# EAGLE board Transistor_Valve_Breakout_Circuit_Manual (EAGLE 9.3.0)
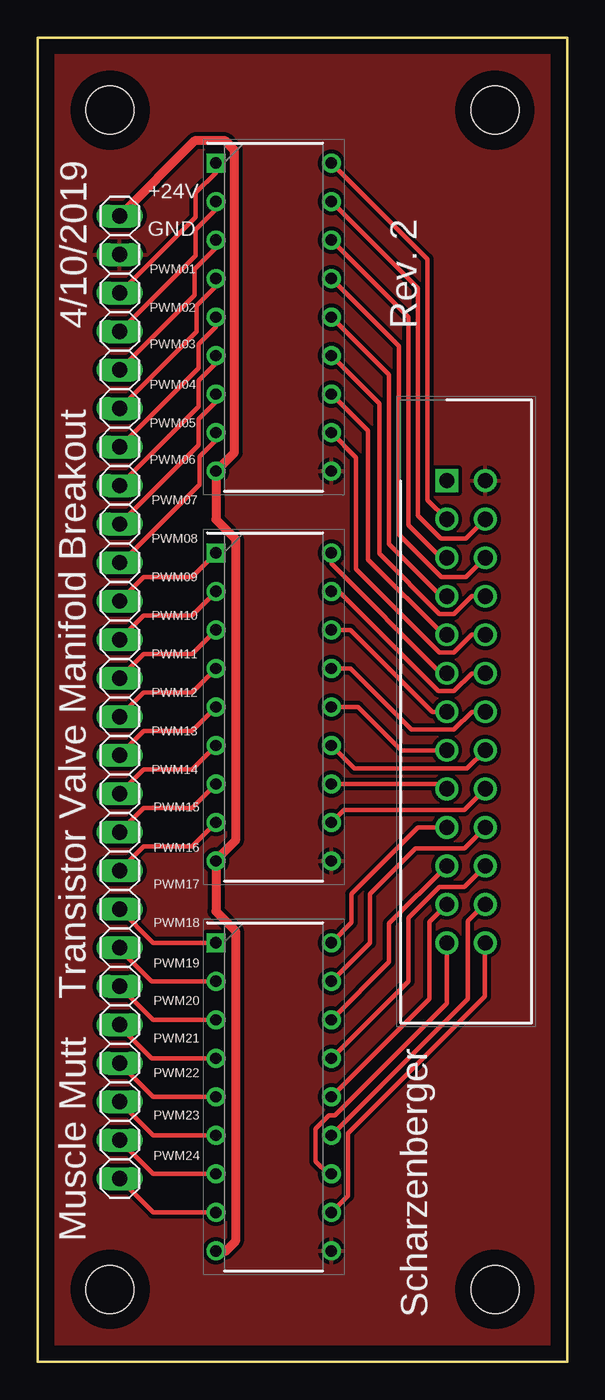
[diagram p0: board, top side]
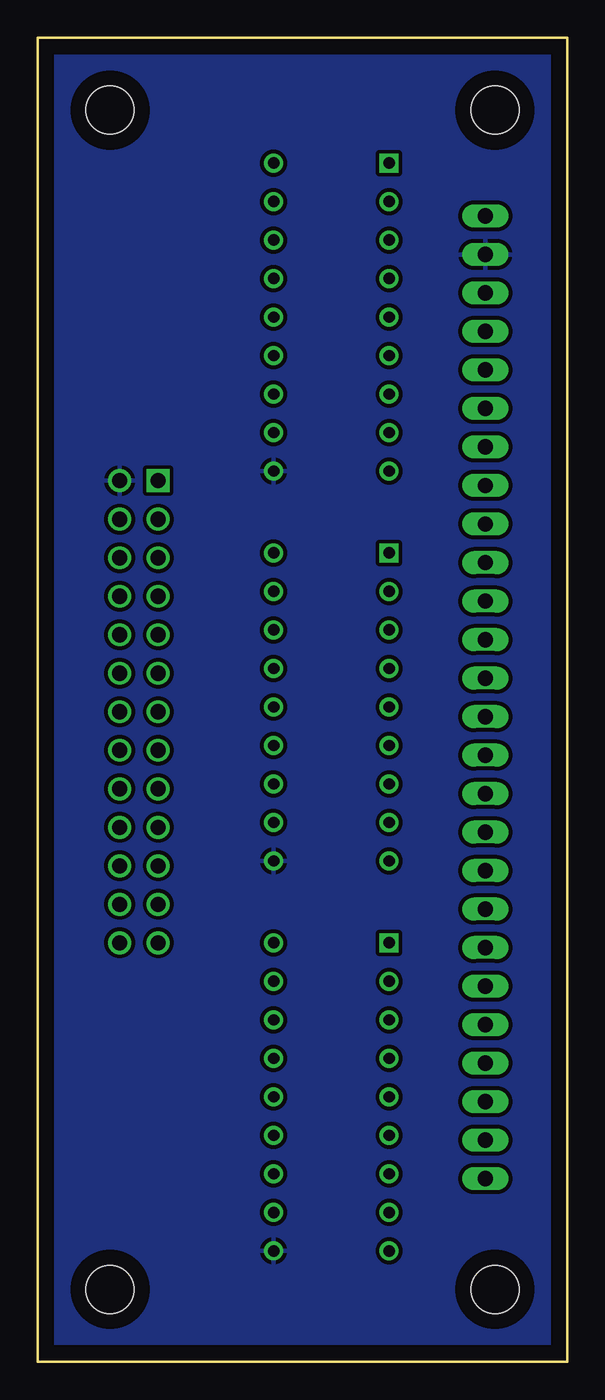
[diagram p1: board, bottom side, seen from below]

Size 34.92 x 87.31 mm. Coordinates in mm from the lower left corner, seen from the top.
Outline: 0,0 34.92,0 34.92,87.31 0,87.31 0,0
Copper layers (1*16): Top 0.035mm / dielectric 1.5mm / Bottom 0.035mm
Design rules "default": minimum track width 6mil, minimum drill 0.35mm, track to track 6mil, track to pad 6mil, pad to pad 6mil, via to via 6mil, smd to smd 6mil, copper to edge 40mil, drill to drill 6mil, minimum pad ring 10mil, minimum via ring 8mil, stop-mask expansion 4mil, vias tented up to drill 0mil, thermal gap 10mil
Net classes: 0 default: width 0.305 mm, drill 0.508 mm, clearance 0.254 mm
Holes 3.17 mm at 4.76,82.55 30.16,82.55 4.76,4.76 30.16,4.76

## Footprints (pad centres in the part's own frame; a part is rotated, then mirrored left to right if it is on the bottom)
DIP762W55P254L2286H480Q18N = drill 0.75 pad 1.15 square: 1 -3.81,10.16 | drill 0.75 pad 1.15: 2 -3.81,7.62; 3 -3.81,5.08; 4 -3.81,2.54; 5 -3.81,0; 6 -3.81,-2.54; 7 -3.81,-5.08; 8 -3.81,-7.62; 9 -3.81,-10.16; 10 3.81,-10.16; 11 3.81,-7.62; 12 3.81,-5.08; 13 3.81,-2.54; 14 3.81,0; 15 3.81,2.54; 16 3.81,5.08; 17 3.81,7.62; 18 3.81,10.16
SHDR26W81P254_2X13_4060X840X94 = drill 1 pad 1.5 square: 1 0,0 | drill 1 pad 1.5: 2 0,2.54; 3 2.54,0; 4 2.54,2.54; 5 5.08,0; 6 5.08,2.54; 7 7.62,0; 8 7.62,2.54; 9 10.16,0; 10 10.16,2.54; 11 12.7,0; 12 12.7,2.54; 13 15.24,0; 14 15.24,2.54; 15 17.78,0; 16 17.78,2.54; 17 20.32,0; 18 20.32,2.54; 19 22.86,0; 20 22.86,2.54; 21 25.4,0; 22 25.4,2.54; 23 27.94,0; 24 27.94,2.54; 25 30.48,0; 26 30.48,2.54
1X24 = drill 1.016 long: 1 -29.21,0; 2 -26.67,0; 3 -24.13,0; 4 -21.59,0; 5 -19.05,0; 6 -16.51,0; 7 -13.97,0; 8 -11.43,0; 9 -8.89,0; 10 -6.35,0; 11 -3.81,0; 12 -1.27,0; 13 1.27,0; 14 3.81,0; 15 6.35,0; 16 8.89,0; 17 11.43,0; 18 13.97,0; 19 16.51,0; 20 19.05,0; 21 21.59,0; 22 24.13,0; 23 26.67,0; 24 29.21,0
1X02 = drill 1.016 long: 1 -1.27,0; 2 1.27,0

## Placement (x,y rotation side)
IC1  TBD62783APG  [DIP762W55P254L2286H480Q18N]  15.56,68.9 0 top
IC2  TBD62783APG  [DIP762W55P254L2286H480Q18N]  15.56,43.18 0 top
IC3  TBD62783APG  [DIP762W55P254L2286H480Q18N]  15.56,17.46 0 top
J1  30326-6002HB  [SHDR26W81P254_2X13_4060X840X94]  26.99,58.1 270 top
JP1  [1X24]  5.4,41.27 270 top
JP2  [1X02]  5.4,74.3 270 top

## Library data of the parts
IC1-IC3 = SamacSys_Parts; DESCRIPTION: Gate Drivers DMOS Transistor Array 7-CH, 50V/0.5A; HEIGHT: 4.8mm; MANUFACTURER_NAME: Toshiba; MANUFACTURER_PART_NUMBER: TBD62783APG; MOUSER_PART_NUMBER: 757-TBD62783APG
J1 = SamacSys_Parts; DESCRIPTION: 3M 303 Series, Series Number 30326, 2.54mm Pitch 26 Way 2 Row Straight Header, Solder Termination, 1A; HEIGHT: 9.4mm; MANUFACTURER_NAME: 3M; MANUFACTURER_PART_NUMBER: 30326-6002HB; MOUSER_PART_NUMBER: 517-30326-6002
JP1 JP2 = pinhead

## Nets
+24V: IC1.9 IC2.9 IC3.9 JP2.1
GND: IC1.10 IC2.10 IC3.10 J1.2 JP2.2
PWM01: IC1.1 JP1.1
PWM02: IC1.2 JP1.2
PWM03: IC1.3 JP1.3
PWM04: IC1.4 JP1.4
PWM05: IC1.5 JP1.5
PWM06: IC1.6 JP1.6
PWM07: IC1.7 JP1.7
PWM08: IC1.8 JP1.8
PWM09: IC2.1 JP1.9
PWM10: IC2.2 JP1.10
PWM11: IC2.3 JP1.11
PWM12: IC2.4 JP1.12
PWM13: IC2.5 JP1.13
PWM14: IC2.6 JP1.14
PWM15: IC2.7 JP1.15
PWM16: IC2.8 JP1.16
PWM17: IC3.1 JP1.17
PWM18: IC3.2 JP1.18
PWM19: IC3.3 JP1.19
PWM20: IC3.4 JP1.20
PWM21: IC3.5 JP1.21
PWM22: IC3.6 JP1.22
PWM23: IC3.7 JP1.23
PWM24: IC3.8 JP1.24
VALVE01: IC1.18 J1.3
VALVE02: IC1.17 J1.4
VALVE03: IC1.16 J1.5
VALVE04: IC1.15 J1.6
VALVE05: IC1.14 J1.7
VALVE06: IC1.13 J1.8
VALVE07: IC1.12 J1.9
VALVE08: IC1.11 J1.10
VALVE09: IC2.18 J1.11
VALVE10: IC2.17 J1.12
VALVE11: IC2.16 J1.13
VALVE12: IC2.15 J1.14
VALVE13: IC2.14 J1.15
VALVE14: IC2.13 J1.16
VALVE15: IC2.12 J1.17
VALVE16: IC2.11 J1.18
VALVE17: IC3.18 J1.19
VALVE18: IC3.17 J1.20
VALVE19: IC3.16 J1.21
VALVE20: IC3.15 J1.22
VALVE21: IC3.14 J1.23
VALVE22: IC3.13 J1.24
VALVE23: IC3.12 J1.25
VALVE24: IC3.11 J1.26

## Tracks (layer width: path | path; a pad name or v marks a point on that pad's centre or on a via)
+24V
  Top 0.61: JP2.1 10.35,80.52 12.37,80.52 12.97,79.92 12.97,59.96 IC1.9 11.75,55.55 13.04,54.26 13.04,34.37 11.75,33.08 IC2.9 11.75,29.71 13.04,28.42 13.04,7.94 12.4,7.3 IC3.9
GND
  pour Top: -1.27,88.9 -1.27,-1.27 36.51,-1.27 36.51,88.9
  pour Bottom: -1.27,88.9 -1.27,-1.27 36.51,-1.27 36.51,88.9
PWM01
  Top 0.305: IC1.1 11.75,78.42 10.41,77.09 10.41,75.5 JP1.1
PWM02
  Top 0.305: JP1.2 10.41,72.96 10.41,74.67 11.75,76.01 IC1.2
PWM03
  Top 0.305: JP1.3 10.35,70.36 10.35,72.07 11.75,73.47 IC1.3
PWM04
  Top 0.305: IC1.4 11.75,70.93 10.48,69.66 10.48,67.95 JP1.4
PWM05
  Top 0.305: IC1.5 11.75,68.26 10.6,67.12 10.6,65.53 JP1.5
PWM06
  Top 0.305: IC1.6 11.75,65.85 10.6,64.71 10.6,62.99 JP1.6
PWM07
  Top 0.305: IC1.7 11.75,63.31 10.6,62.17 10.6,60.45 JP1.7
PWM08
  Top 0.305: IC1.8 11.75,60.77 10.67,59.69 10.67,57.85 5.52,52.7 JP1.8
PWM09
  Top 0.305: IC2.1 10.16,51.75 6.99,51.75 JP1.9
PWM10
  Top 0.305: IC2.2 10.16,49.21 6.99,49.21 JP1.10
PWM11
  Top 0.305: IC2.3 10.16,46.67 6.99,46.67 JP1.11
PWM12
  Top 0.305: IC2.4 10.16,44.13 6.99,44.13 JP1.12
PWM13
  Top 0.305: IC2.5 10.16,41.59 6.99,41.59 JP1.13
PWM14
  Top 0.305: IC2.6 10.16,39.05 6.99,39.05 JP1.14
PWM15
  Top 0.305: IC2.7 10.16,36.51 6.99,36.51 JP1.15
PWM16
  Top 0.305: IC2.8 10.16,33.97 6.99,33.97 JP1.16
PWM17
  Top 0.305: IC3.1 7.62,27.62 JP1.17
PWM18
  Top 0.305: IC3.2 7.49,25.08 5.4,27.18 JP1.18
PWM19
  Top 0.305: IC3.3 7.62,22.54 JP1.19
PWM20
  Top 0.305: JP1.20 5.4,22.1 7.49,20 IC3.4
PWM21
  Top 0.305: IC3.5 7.62,17.46 JP1.21
PWM22
  Top 0.305: IC3.6 7.62,14.92 JP1.22
PWM23
  Top 0.305: IC3.7 7.62,12.38 JP1.23
PWM24
  Top 0.305: IC3.8 7.62,9.84 JP1.24
VALVE01
  Top 0.305: J1.3 25.72,56.83 25.72,72.71 IC1.18
VALVE02
  Top 0.305: J1.4 28.26,54.29 26.61,54.29 25.08,55.82 25.08,70.8 IC1.17
VALVE03
  Top 0.305: J1.5 26.61,53.02 24.45,55.18 24.45,68.9 IC1.16
VALVE04
  Top 0.305: IC1.15 23.81,66.99 23.81,54.56 26.62,51.75 28.26,51.75 J1.6
VALVE05
  Top 0.305: J1.7 26.61,50.48 23.18,53.91 23.18,65.09 IC1.14
VALVE06
  Top 0.305: IC1.13 22.52,63.2 22.52,53.3 26.51,49.32 27.47,49.32 28.63,50.48 J1.8
VALVE07
  Top 0.305: IC1.12 21.78,61.4 21.78,52.91 26.74,47.94 J1.9
VALVE08
  Top 0.305: IC1.11 21,59.64 21,52.39 21,52.35 21,52.29 26.51,46.78 27.47,46.78 28.63,47.94 J1.10
VALVE09
  Top 0.305: J1.11 26.61,45.4 19.37,52.64 IC2.18
VALVE10
  Top 0.305: J1.12 28.63,45.4 27.47,44.24 26.43,44.24 19.88,50.8 IC2.17
VALVE11
  Top 0.305: IC2.16 20.64,48.26 26.04,42.86 J1.13
VALVE12
  Top 0.305: J1.14 28.63,42.86 27.47,41.7 24.66,41.7 20.64,45.72 IC2.15
VALVE13
  Top 0.305: IC2.14 21.12,43.18 23.98,40.32 J1.15
VALVE14
  Top 0.305: J1.16 28.32,39.12 20.89,39.12 IC2.13
VALVE15
  Top 0.305: J1.17 26.67,38.1 IC2.12
VALVE16
  Top 0.305: IC2.11 20.21,36.4 28.15,36.4 J1.18
VALVE17
  Top 0.305: J1.19 25.08,35.24 20.7,30.86 20.7,28.96 IC3.18
VALVE18
  Top 0.305: IC3.17 21.91,27.62 21.91,30.85 24.92,33.86 28.15,33.86 J1.20
VALVE19
  Top 0.305: IC3.16 23.18,26.35 23.18,28.89 J1.21
VALVE20
  Top 0.305: IC3.15 24.45,25.08 24.45,29.26 26.51,31.32 28.15,31.32 J1.22
VALVE21
  Top 0.305: IC3.14 25.83,23.92 25.83,28.99 J1.23
VALVE22
  Top 0.305: IC3.13 28.37,23.92 28.37,29.06 29.47,30.16 J1.24
VALVE23
  Top 0.305: IC3.12 19.17,12.38 18.33,13.22 18.33,15.35 19.22,16.24 19.61,16.24 26.99,23.62 J1.25
VALVE24
  Top 0.305: J1.26 29.49,27.58 29.49,24.09 20.45,15.05 20.45,10.92 IC3.11

## Text on the board
tPlace: +24V | GND | PWM01 | PWM02 | 4/10/2019 | Rev. 2 | PWM03 | PWM04 | PWM05 | PWM06 | PWM07 | PWM08 | PWM09 | PWM10 | PWM11 | PWM12 | Transistor Valve Manifold Breakout | PWM13 | PWM14 | PWM15 | PWM16 | PWM17 | PWM18 | PWM19 | PWM20 | PWM21 | PWM22 | PWM23 | PWM24 | Muscle Mutt | Scharzenberger